# Altium PCB AMS_Master.PcbDoc
Units mm, origin at the board's own origin, x right, y up, seen from the top; angles counter-clockwise.
Board outline 71.43 x 38.75 mm, 4 copper layers (Top Layer, GND, +3.3V, Bottom Layer), stack 0.603 mm thick; 94 components, 55 nets, 299 pads, 64 vias.
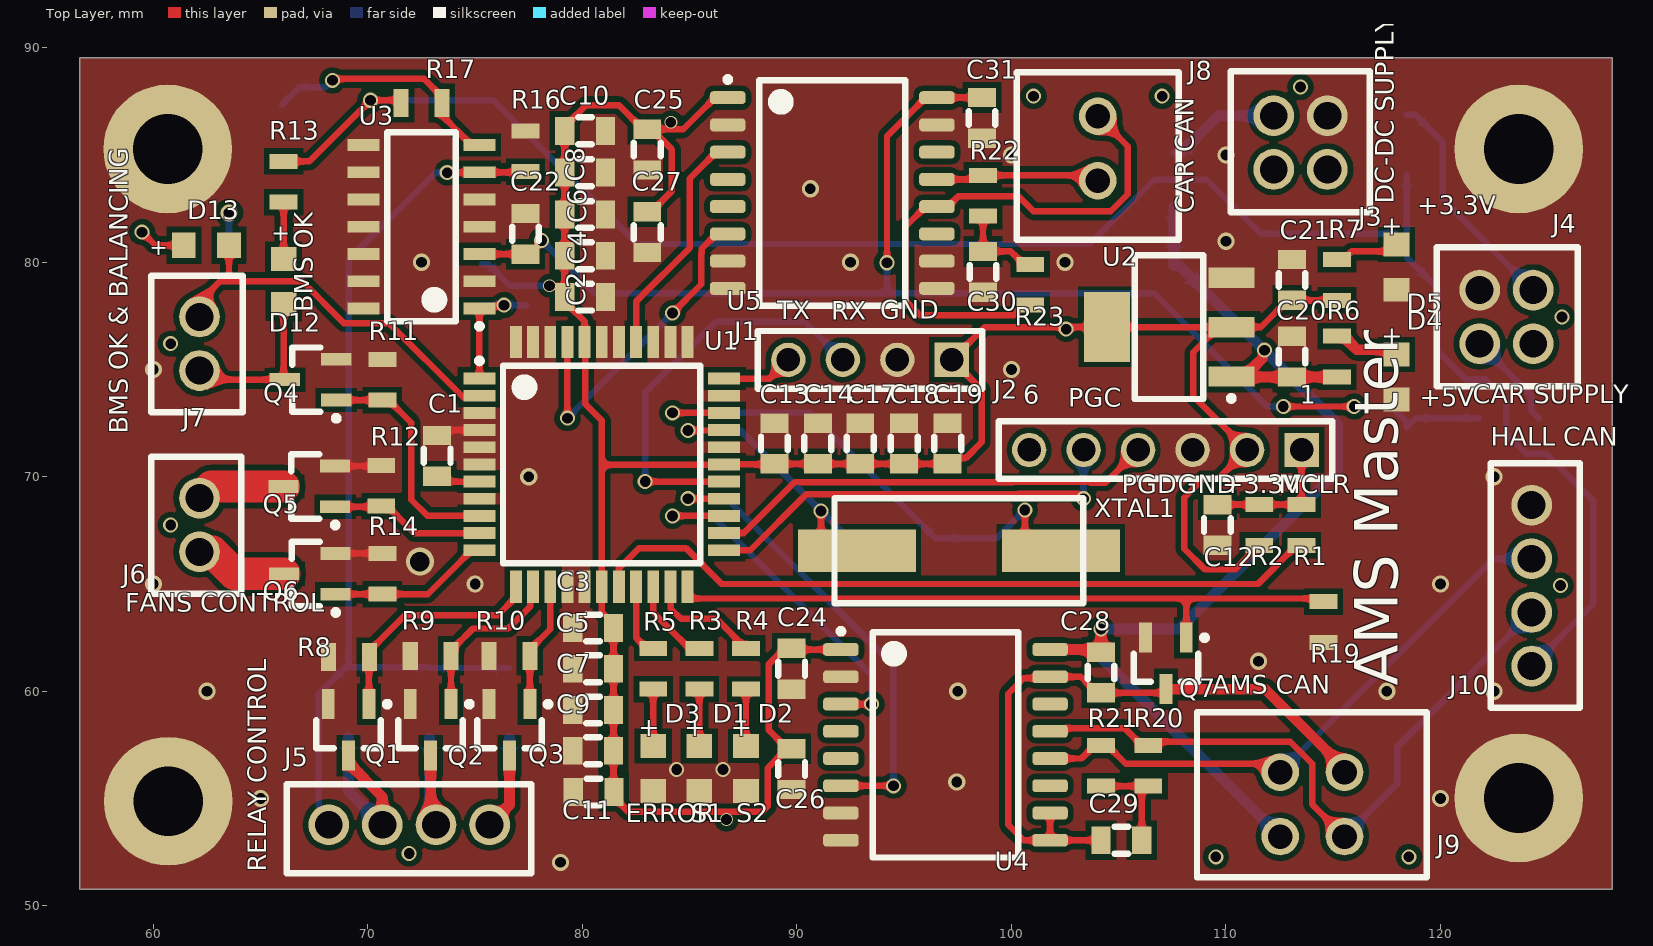
[diagram p0: Top Layer view]
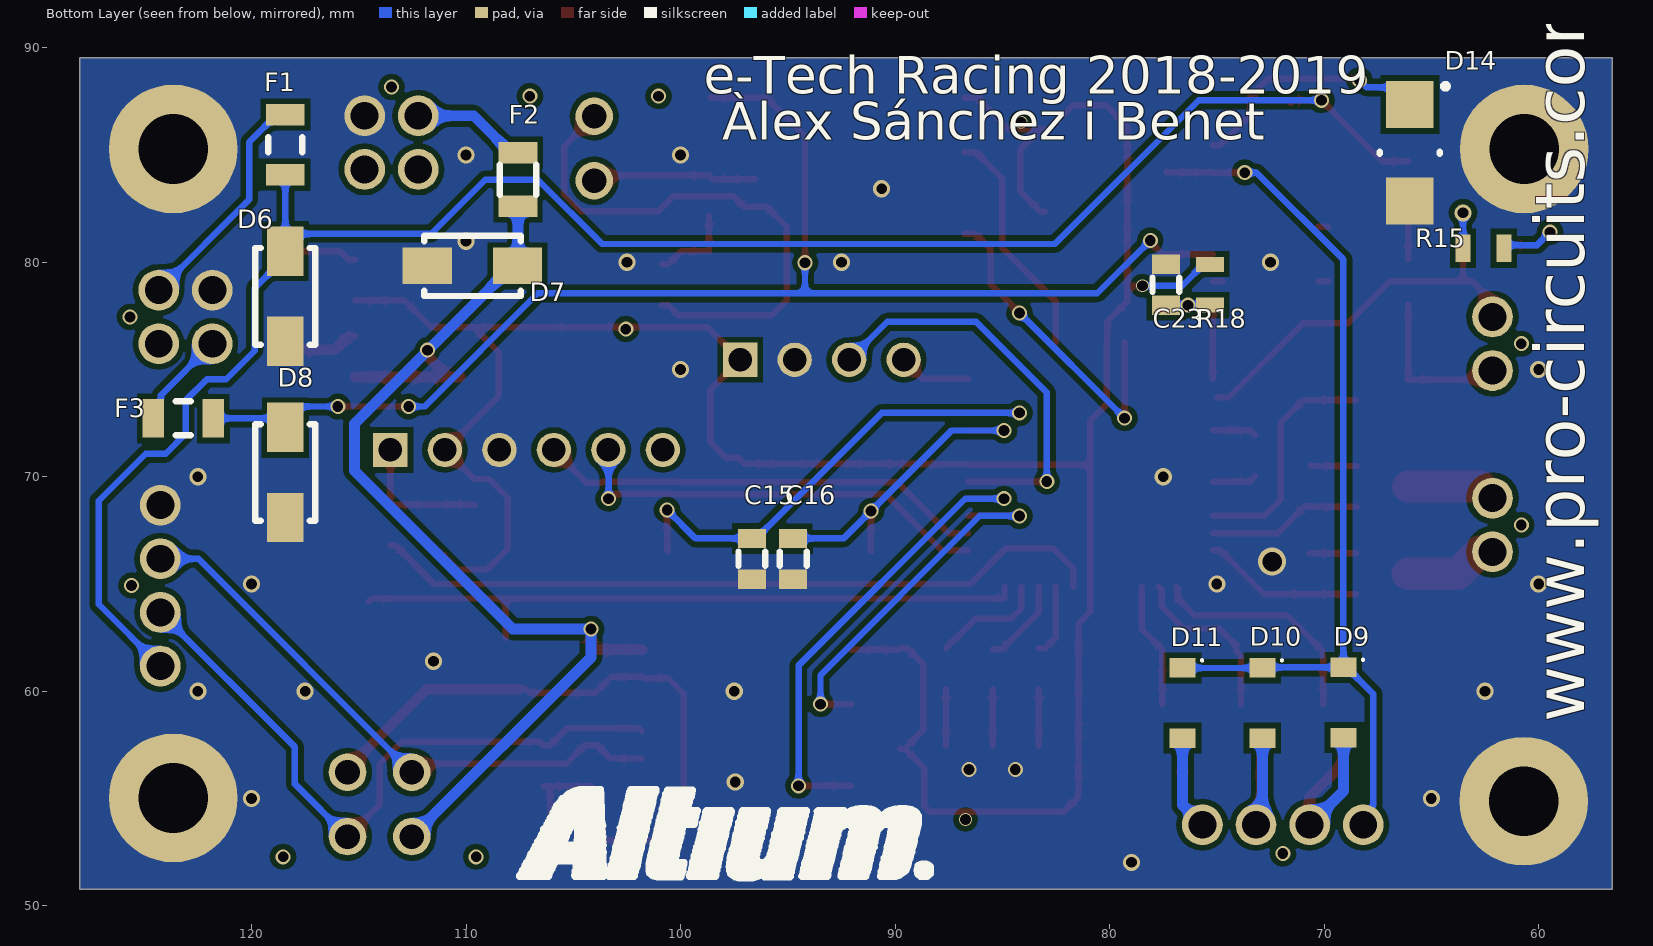
[diagram p1: Bottom Layer view, seen from below]
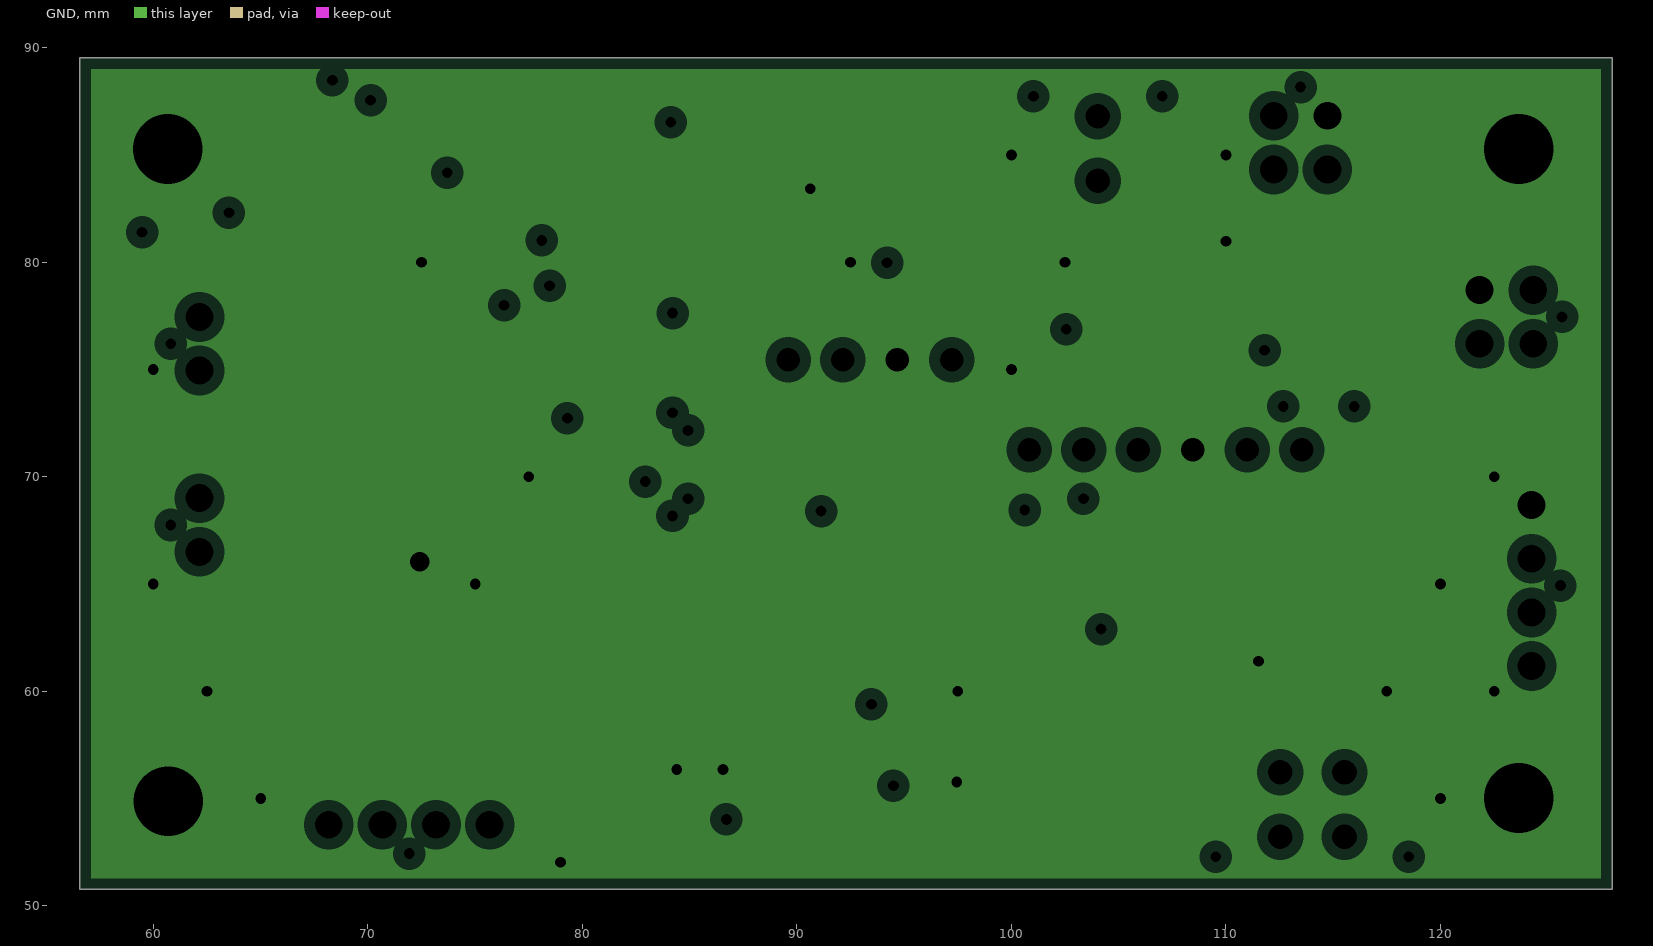
[diagram p2: GND, clearances drawn from the general rule]
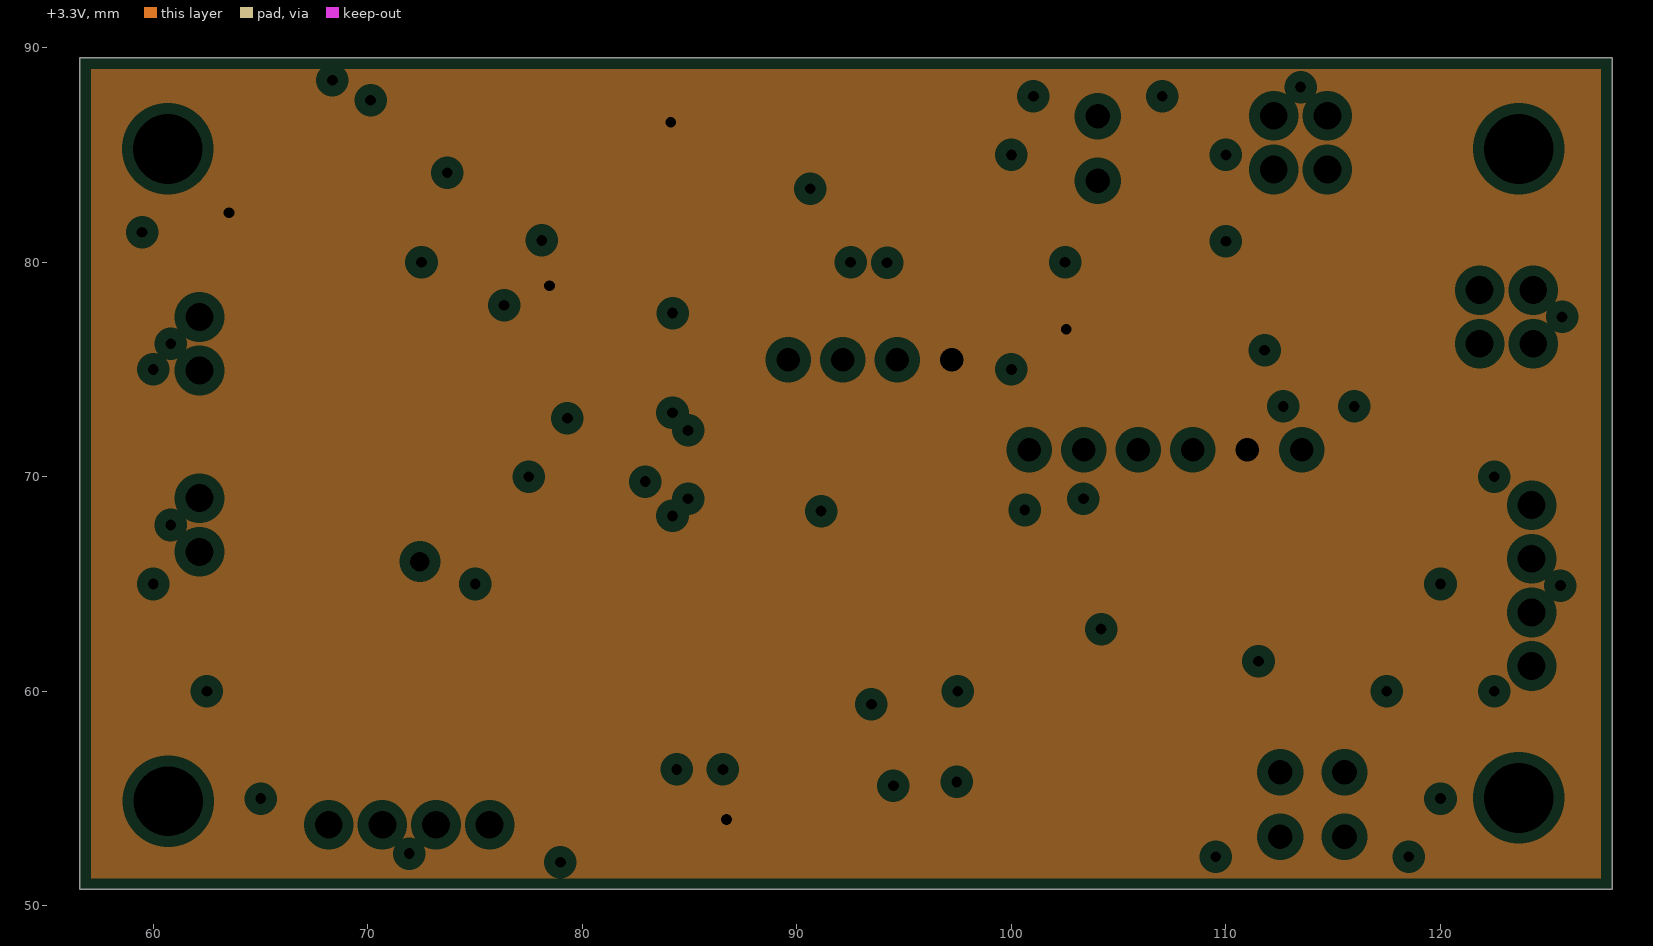
[diagram p3: +3.3V, clearances drawn from the general rule]
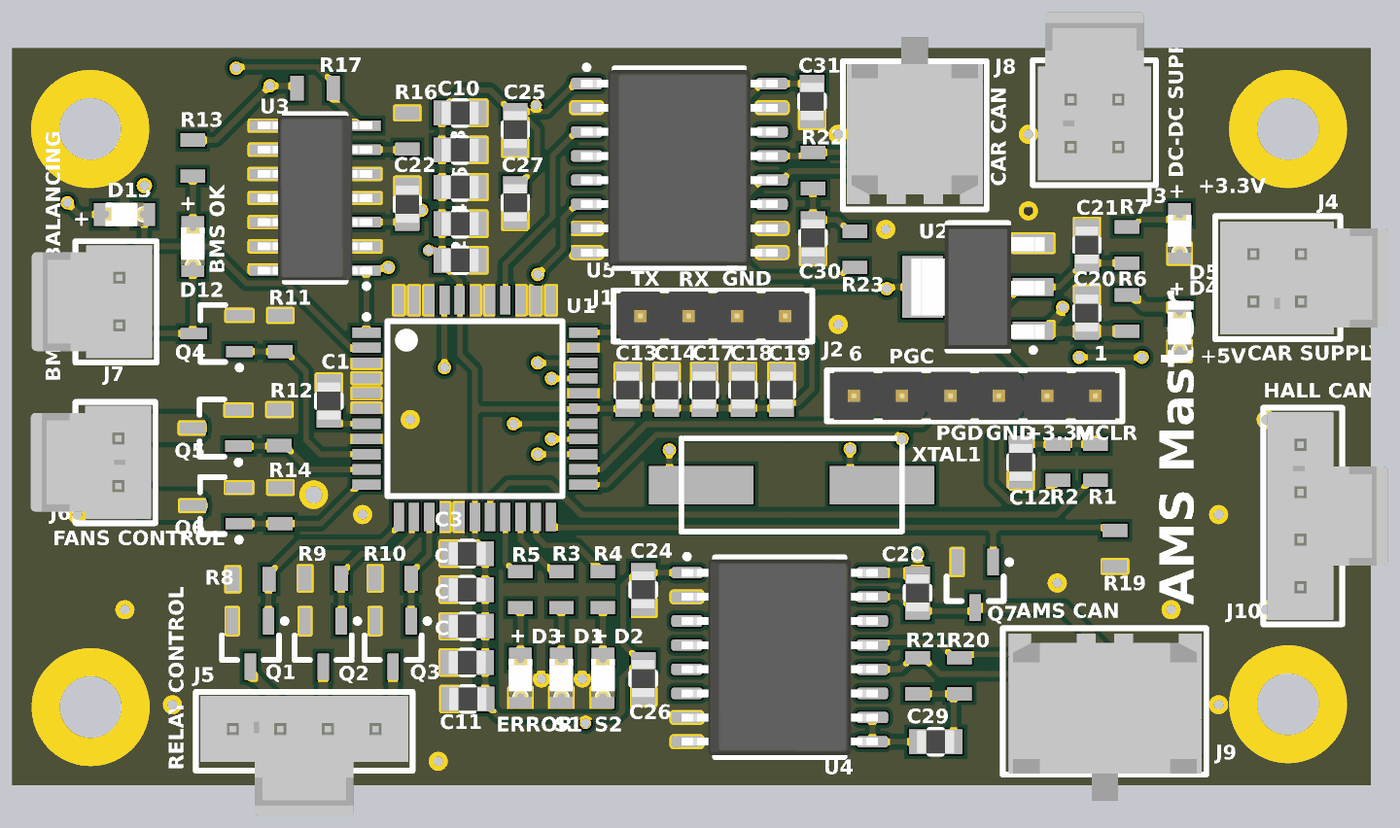
[diagram p4: 3D render of the assembled board from above, using the file's embedded part models]

## Layer stack, top to bottom
Top Solder: solder mask 0.0102, Solder Resist, Dk 3.5
Top Layer: signal copper 0.0356
Dielectric 2: prepreg 0.0711, PP-006, Dk 4.1
GND: plane copper 0.035, net GND
Dielectric 1: dielectric 0.32, FR-4, Dk 4.8
+3.3V: plane copper 0.035, net +3.3
Dielectric 3: prepreg 0.0711, PP-006, Dk 4.1
Bottom Layer: signal copper 0.0356
Bottom Solder: solder mask 0.0102, Solder Resist, Dk 3.5

## Board outline
56.575,50.775 56.575,89.525 128,89.525 128,50.775

## Design rules (kind name [scope] priority, off if disabled: settings)
Clearance [All] p1: gap=0.254 ignorepadtopadclearanceinfootprint=FALSE except(0: Arc-Hole Track-Hole SMDPad-Hole THPad-Hole Via-Hole Fill-Hole Poly-Hole Region-Hole Text-Hole; 0.2: SMDPad-SMDPad)
PlaneClearance [All] p1: clearance=0.508
PlaneConnect [All] p1: planeconnectstyle=Relief reliefexpansion=0.508 reliefentries=4 reliefconductorwidth=0.254 reliefairgap=0.254
PolygonConnect [All] p1: connectstyle=Direct reliefconductorwidth=0.254 reliefentries=4 polygonreliefangle="90 Angle" airgapwidth=0.254
RoomDefinition AMS_supply [InComponentClass('AMS_supply')] p1: confinementstyle=ConfineIn formatcopy=TRUE lockcomponents=FALSE outline 102.65,65.975 129.675,65.975 129.675,92.1 102.65,92.1
RoomDefinition AMS_MCU [InComponentClass('AMS_MCU')] p2: confinementstyle=ConfineIn formatcopy=TRUE lockcomponents=FALSE outline 72.1,54.2 115.175,54.2 115.175,96.4 72.1,96.4
RoomDefinition AMS_Control_2 [InComponentClass('AMS_Control_2')] p3: confinementstyle=ConfineIn formatcopy=TRUE lockcomponents=FALSE outline 56.325,52.1 84.05,52.1 84.05,89.475 56.325,89.475
RoomDefinition AMS_Control [InComponentClass('AMS_Control')] p4: confinementstyle=ConfineIn formatcopy=TRUE lockcomponents=FALSE outline 79.875,47.475 79.875,82.025 56.975,82.025 56.975,47.475
RoomDefinition AMS_CAN [InComponentClass('AMS_CAN')] p5: confinementstyle=ConfineIn formatcopy=TRUE lockcomponents=FALSE outline 54.023,48.175 130.45,48.175 130.45,94.95 54.023,94.95
RoutingVias [All] p1: holewidth=0.3 width=0.3 viastyle="Through Hole" minholewidth=0.3 minwidth=0.3 maxholewidth=0.7 maxwidth=0.7
SolderMaskExpansion [All] p1: expansion=0.102
Width [All] p1: maxlimit=1.5 minlimit=0.254 preferedwidth=0.254 minimp=50.000000 maximp=50.000000 favimp=50.000000
28 further rules are at their usual default settings.

## Classes and differential pairs
component class AMS_Control_2: C22 C23 D14 R16 R17 R18 U3
component class AMS_supply: C20 C21 D4 D5 D6 D7 D8 F1 F2 F3 J3 J4 R6 R7 U2
component class AMS_MCU: C1 C2 C3 C4 C5 C6 C7 C8 C9 C10 C11 C12 C13 C14 C15 C16 C17 C18 C19 D1 D2 D3 J1 J2 R1 R2 R3 R4 R5 U1 XTAL1
component class AMS_Control: D9 D10 D11 D12 D13 J5 J6 J7 Q1 Q2 Q3 Q4 Q5 Q6 R8 R9 R10 R11 R12 R13 R14 R15
component class AMS_CAN: C24 C25 C26 C27 C28 C29 C30 C31 J8 J9 J10 Q7 R19 R20 R21 R22 R23 U4 U5

## Components (designator, comment, footprint, x,y, rotation, side; value= is the part's Value field where it differs from the comment)
C1 "10uF" "0805_2x1.25x1.25mm_Reflow Soldering" 73.225,70.975 r90 top
C2 "1uF" "0805_2x1.25x1.25mm_Reflow Soldering" 80.125,78.375 r0 top
C3 "1uF" "0805_2x1.25x1.25mm_Reflow Soldering" 80.5,62.95 r180 top
C4 "100nF" "0805_2x1.25x0.8mm_Reflow Soldering" 80.125,80.3 r0 top
C5 "100nF" "0805_2x1.25x0.8mm_Reflow Soldering" 80.5,61.05 r180 top
C6 "10nF" "0805_2x1.25x0.8mm_Reflow Soldering" 80.125,82.225 r0 top
C7 "10nF" "0805_2x1.25x0.8mm_Reflow Soldering" 80.5,59.125 r180 top
C8 "1nF" "0805_2x1.25x0.8mm_Reflow Soldering" 80.125,84.175 r0 top
C9 "1nF" "0805_2x1.25x0.8mm_Reflow Soldering" 80.5,57.225 r180 top
C10 "100pF" "0805_2x1.25x0.6mm_Reflow Soldering" 80.125,86.125 r0 top
C11 "100pF" "0805_2x1.25x0.6mm_Reflow Soldering" 80.525,55.3 r180 top
C12 "10nF" "0805_2x1.25x0.8mm_Reflow Soldering" 109.6,67.75 r90 top
C13 "100pF" "0805_2x1.25x0.6mm_Reflow Soldering" 88.95,71.55 r90 top
C14 "1nF" "0805_2x1.25x0.8mm_Reflow Soldering" 90.975,71.55 r90 top
C15 "15pF" "0805_2x1.25x0.6mm_Reflow Soldering" 96.675,66.175 r270 bottom
C16 "15pF" "0805_2x1.25x0.6mm_Reflow Soldering" 94.75,66.175 r270 bottom
C17 "10nF" "0805_2x1.25x0.8mm_Reflow Soldering" 92.95,71.55 r90 top
C18 "100nF" "0805_2x1.25x0.8mm_Reflow Soldering" 95,71.55 r90 top
C19 "1uF" "0805_2x1.25x1.25mm_Reflow Soldering" 97.025,71.55 r90 top
C20 "100nF" "0805_2x1.25x0.8mm_Reflow Soldering" 113.075,75.6 r270 top
C21 "10nF" "0805_2x1.25x0.8mm_Reflow Soldering" 113.075,79.175 r270 top
C22 "100nF" "0805_2x1.25x0.8mm_Reflow Soldering" 77.35,81.325 r270 top
C23 "15pF" "0805_2x1.25x0.6mm_Reflow Soldering" 77.375,78.95 r270 bottom
C24 "10uF" "0805_2x1.25x1.25mm_Reflow Soldering" 89.75,61.05 r90 top
C25 "10uF" "0805_2x1.25x1.25mm_Reflow Soldering" 83.025,85.25 r90 top
C26 "100nF" "0805_2x1.25x0.8mm_Reflow Soldering" 89.75,56.375 r90 top
C27 "100nF" "0805_2x1.25x0.8mm_Reflow Soldering" 83.025,81.4 r90 top
C28 "100nF" "0805_2x1.25x0.8mm_Reflow Soldering" 104.175,60.875 r90 top
C29 "10nF" "0805_2x1.25x0.8mm_Reflow Soldering" 105.125,53.055 r0 top
C30 "10nF" "0805_2x1.25x0.8mm_Reflow Soldering" 98.675,79.551 r90 top
C31 "100nF" "0805_2x1.25x0.8mm_Reflow Soldering" 98.625,86.725 r90 top
D1 "Blue" WL-SMCW_0805 85.45,56.4 r90 top
D2 "Blue" WL-SMCW_0805 87.625,56.4 r90 top
D3 "Red" WL-SMCW_0805 83.3,56.4 r90 top
D4 "Green" WL-SMCW_0805 117.95,74.65 r90 top
D5 "Bright Green" WL-SMCW_0805 117.95,79.775 r90 top
D6 "12V" WE-TVSP_DO-214AC_Bidirectional 118.425,78.413 r90 bottom
D7 "5V" WE-TVSP_DO-214AC_Bidirectional 109.7,79.825 r180 bottom
D8 "5V" WE-TVSP_DO-214AC_Bidirectional 118.425,70.2 r90 bottom
D9 "MBR0540T1G" MBR0540T1G 69.1,59.475 r270 bottom
D10 "MBR0540T1G" MBR0540T1G 72.875,59.45 r270 bottom
D11 "MBR0540T1G" MBR0540T1G 76.6,59.45 r270 bottom
D12 "Blue" WL-SMCW_0805 66.075,79.1 r90 top
D13 "Blue" WL-SMCW_0805 62.475,80.789 r180 top
D14 "6.2V" BZG05C-M-Series 66,85.1 r270 bottom
F1 "30V, 0.125A" 1206L012 118.425,85.475 r90 bottom
F2 "63 V, 1A" "437 Series" 107.575,83.85 r90 bottom
F3 "30V, 0.125A" 1206L012 123.175,72.725 r0 bottom
J1 "61300411121" 61300411121 93.41,75.45 r180 top
J2 "61300611121" 61300611121 107.175,71.25 r180 top
J3 "105310-2104" 105310-2104 113.475,86.825 r0 top
J4 "105310-1104" 105310-1104 124.325,77.45 r270 top
J5 "105309-1104" 105309-1104 71.925,53.775 r180 top
J6 "105309-1102" 105309-1102 62.15,67.75 r90 top
J7 "105309-2102" 105309-2102 62.15,76.2 r90 top
J8 "43045-0212" 43045-0212 104.025,85.3 r270 top
J9 "43045-0427" 43045-0427 114.025,53.225 r180 top
J10 "105309-2104" 105309-2104 124.25,64.925 r270 top
Q1 "CPH3455" CPH3455 69.1,58.2 r270 top
Q2 "CPH3455" CPH3455 72.925,58.2 r270 top
Q3 "CPH3455" CPH3455 76.6,58.2 r270 top
Q4 "CPH3455" CPH3455 67.325,74.525 r180 top
Q5 "CPH3455" CPH3455 67.275,69.55 r180 top
Q6 "CPH3455" CPH3455 67.3,65.475 r180 top
Q7 "CPH3455" CPH3455 107.2,61.3 r270 top
R1 "100Ω" CR0805 113.525,67.75 r90 top
R2 "10kΩ" CR0805 111.55,67.75 r270 top
R3 "470Ω" CR0805 85.45,61.05 r90 top
R4 "470Ω" CR0805 87.625,61.05 r90 top
R5 "470Ω" CR0805 83.3,61.05 r90 top
R6 "470Ω" CR0805 115.175,75.6 r270 top
R7 "470Ω" CR0805 115.175,79.175 r270 top
R8 "10kΩ" CR0805 69.125,61.6 r0 top
R9 "10kΩ" CR0805 72.925,61.65 r0 top
R10 "10kΩ" CR0805 76.6,61.65 r0 top
R11 "10kΩ" CR0805 70.675,74.525 r270 top
R12 "10kΩ" CR0805 70.625,69.575 r270 top
R13 "10kΩ" CR0805 66.075,83.75 r90 top
R14 "10kΩ" CR0805 70.675,65.475 r270 top
R15 "470Ω" CR0805 62.575,80.65 r0 bottom
R16 "10kΩ" CR0805 77.35,85.175 r270 top
R17 "10kΩ" CR0805 72.5,87.425 r180 top
R18 "10kΩ" CR0805 75.325,78.95 r90 bottom
R19 "10kΩ" CR0805 114.55,63.225 r90 top
R20 "60.4Ω" CR0805 106.375,56.525 r90 top
R21 "60.4Ω" CR0805 104.175,56.525 r90 top
R22 "60.4Ω" CR0805 98.675,83.1 r90 top
R23 "60.4Ω" CR0805 100.875,78.95 r270 top
U1 "dsPIC33EP256GM604" dsPIC33EP256GM604 80.9,70.575 r0 top
U2 "1.5 - 13.8 Vin, 3.3 Vout" LM1117IMP3.3 107.35,76.975 r180 top
U3 "LM339D" LM339D 72.5,81.65 r180 top
U4 "ISO1050DW" ISO1050DW 96.925,57.5 r0 top
U5 "ISO1050DW" ISO1050DW 91.65,83.225 r0 top
XTAL1 "20MHz" 830028710 97.55,66.55 r0 top

## Footprints (in the part's own frame and the unit in brackets; to place one, negate y for a bottom-side part, rotate by r counter-clockwise, add the part's x,y. Pads: shape width x height; smd on the part's side, far side on the other; paste and mask are expansions set on the pad)
"437 Series" [mm] "Littlefuse, 437A Series"
  rect 1x1.8 smd: 1(-1.25,0) 2(1.25,0)
  silkscreen extent -0.7,-0.85 0.7,0.85, body extent -1.6,-0.71 1.6,0.71, height 1
"0805_2x1.25x0.6mm_Reflow Soldering" [mm] "Ceramic Capacitors, 0805, body 2x1.25mm"
  rect 0.9x1.3 smd: 1(-0.95,0) 2(0.95,0)
  silkscreen extent -0.32,-0.62 0.32,0.63, body extent -1,-0.62 1,0.63, height 0.63
"0805_2x1.25x0.8mm_Reflow Soldering" [mm] "Ceramic Capacitors, 0805, body 2x1.25mm"
  rect 0.9x1.3 smd: 1(-0.95,0) 2(0.95,0)
  silkscreen extent -0.32,-0.62 0.32,0.63, body extent -1,-0.62 1,0.63, height 0.83
"0805_2x1.25x1.25mm_Reflow Soldering" [mm] "Ceramic Capacitors, 0805, body 2x1.25mm"
  rect 0.9x1.3 smd: 1(-0.95,0) 2(0.95,0)
  silkscreen extent -0.32,-0.62 0.32,0.63, body extent -1,-0.62 1,0.63, height 1.28
1206L012 [mm] "Littelfuse, 1206L Series"
  rect 1x1.8 smd: 1(-1.4,0) 2(1.4,0)
  silkscreen extent -0.35,-0.8 0.35,0.8, body extent -1.7,-0.9 1.7,0.9, height 1.45
43045-0212 [mm] "Micro-Fit 3.0 Vertical Header, 3.00mm Pitch, Dual Row, 2 Circuits, Black"
  round 1.75 hole 1.15: 1(1.5,0) 2(-1.5,0)
  silkscreen extent -3.55,-3.77 4.25,3.77, body extent -4.8,-3.57 3.97,3.58, height 9.95
43045-0427 [mm] "Micro-Fit 3.0 Vertical Header, 3.00mm Pitch, Dual Row, 4 Circuits, Black"
  round 1.75 hole 1.15: 1(1.5,0) 2(-1.5,0) 3(1.5,-3) 4(-1.5,-3)
  silkscreen extent -5.33,-5.8 5.38,1.9, body extent -5.07,-5.52 5.08,3.25, height 9.95
105309-1102 [mm] "Molex, Nano-Fit, Right Angle, Single Row, 2 Circuits, Pitch 2.5 mm, Black"
  round 1.9 hole 1.3: 1(1.25,0) 2(-1.25,0)
  silkscreen extent -3.2,-1.95 3.17,2.25, body extent -2.97,-1.74 2.97,4.6, height 10.53
105309-1104 [mm] "Molex, Nano-Fit, Right Angle, Single Row, 4 Circuits, Pitch 2.5 mm, Black"
  round 1.9 hole 1.3: 1(3.75,0) 2(1.25,0) 3(-1.25,0) 4(-3.75,0)
  silkscreen extent -5.7,-1.9 5.7,2.25, body extent -5.47,-1.69 5.47,4.65, height 10.53
105309-2102 [mm] "Molex, Nano-Fit, Right Angle, Single Row, 2 Circuits, Pitch 2.5 mm, Natural"
  round 1.9 hole 1.3: 1(1.25,0) 2(-1.25,0)
  silkscreen extent -3.2,-2.02 3.17,2.25, body extent -2.97,-1.79 2.97,4.55, height 10.53
105309-2104 [mm] "Molex, Nano-Fit, Right Angle, Single Row, 4 Circuits, Pitch 2.5 mm, Natural"
  round 1.9 hole 1.3: 1(3.75,0) 2(1.25,0) 3(-1.25,0) 4(-3.75,0)
  silkscreen extent -5.7,-1.9 5.7,2.25, body extent -5.47,-1.69 5.47,4.65, height 10.53
105310-1104 [mm] "Molex, Nano-Fit, Right Angle, Dual Row, 4 Circuits, Pitch 2.5 mm, Black"
  round 1.9 hole 1.3: 1(1.25,0) 2(-1.25,0) 3(1.25,-2.5) 4(-1.25,-2.5)
  silkscreen extent -3.25,-4.5 3.22,2.07, body extent -2.97,-4.24 2.97,4.6, height 10.53
105310-2104 [mm] "Molex, Nano-Fit, Right Angle, Dual Row, 4 Circuits, Pitch 2.5 mm, Natural"
  round 1.9 hole 1.3: 1(1.25,0) 2(-1.25,0) 3(1.25,-2.5) 4(-1.25,-2.5)
  silkscreen extent -3.25,-4.5 3.22,2.07, body extent -2.97,-4.24 2.97,4.6, height 10.53
830028710 [mm]
  rect 5.5x2 smd: 1(-4.75,0) 2(4.75,0)
  silkscreen extent -5.8,-2.45 5.8,2.45, body extent -5.8,-2.45 5.8,2.45, height 4.3
61300411121 [mm] "Pin Header, pitch 2.54 mm, THT, Vertical, single row, 4p"
  rect 1.6x1.6 hole 1.1: 1(-3.81,0)
  round 1.6 hole 1.1: 2(-1.27,0) 3(1.27,0) 4(3.81,0)
  silkscreen extent -5.23,-1.35 5.23,1.35, body extent -5.08,-1.27 5.08,1.27, height 8.57
61300611121 [mm] "Pin Header, pitch 2.54 mm, THT, Vertical, single row, 6p"
  rect 1.6x1.6 hole 1.1: 1(-6.35,0)
  round 1.6 hole 1.1: 2(-3.81,0) 3(-1.27,0) 4(1.27,0) 5(3.81,0) 6(6.35,0)
  silkscreen extent -7.77,-1.35 7.77,1.35, body extent -7.62,-1.27 7.62,1.27, height 8.57
BZG05C-M-Series [mm] "Molded Diode, 2-Leads, Body 4,35x2,55mm, IPC Medium Density"
  rect 2.2x2.21 smd: 1(-2.25,0) 2(2.25,0)
  silkscreen extent -3.22,-1.4 0.05,1.78, body extent -2.25,-1.4 2.25,1.4, height 2.3
CPH3455 [mm] "SOT23, 3-Leads, Body 2,90x2,80mm, Pitch 0,95mm, IPC Medium Density"
  rect 1.4x0.6 smd: 1(-1.2,0.95) 2(-1.2,-0.95) 3(1.2,0)
  silkscreen extent -1.32,-1.5 0.85,1.93, body extent -0.85,-1.5 0.85,1.5, height 0.95
CR0805 [mm] "Chip Resistor, 2-Leads, Body 2,00x1,25mm, IPC Medium Density"
  rect 0.7x1.3 smd: 1(-0.95,0) 2(0.95,0)
  body extent -1.08,-0.7 1.07,0.7, height 0.6
dsPIC33EP256GM604 [mm] "TQFP, 44-Leads, Body 10,00x10,00mm, Pitch 0,80mm, IPC Medium Density"
  rect 1.5x0.55 smd: 1(-5.7,4) 2(-5.7,3.2) 3(-5.7,2.4) 4(-5.7,1.6) 5(-5.7,0.8) 6(-5.7,0) 7(-5.7,-0.8) 8(-5.7,-1.6) 9(-5.7,-2.4) 10(-5.7,-3.2) 11(-5.7,-4) 23(5.7,-4) 24(5.7,-3.2) 25(5.7,-2.4) 26(5.7,-1.6) 27(5.7,-0.8) 28(5.7,0) 29(5.7,0.8) 30(5.7,1.6) 31(5.7,2.4) 32(5.7,3.2) 33(5.7,4)
  rect 0.55x1.5 smd: 12(-4,-5.7) 13(-3.2,-5.7) 14(-2.4,-5.7) 15(-1.6,-5.7) 16(-0.8,-5.7) 17(0,-5.7) 18(0.8,-5.7) 19(1.6,-5.7) 20(2.4,-5.7) 21(3.2,-5.7) 22(4,-5.7) 34(4,5.7) 35(3.2,5.7) 36(2.4,5.7) 37(1.6,5.7) 38(0.8,5.7) 39(0,5.7) 40(-0.8,5.7) 41(-1.6,5.7) 42(-2.4,5.7) 43(-3.2,5.7) 44(-4,5.7)
  silkscreen extent -5.82,-4.6 4.6,4.95, body extent -5,-5 5,5, height 1.2
ISO1050DW [mm] "SOIC, 16-Leads, Body 10,30x7,50mm, Pitch 1,27mm, IPC Medium Density"
  rrect50% 1.65x0.6 smd: 1(-4.875,4.445) 2(-4.875,3.175) 3(-4.875,1.905) 4(-4.875,0.635) 5(-4.875,-0.635) 6(-4.875,-1.905) 7(-4.875,-3.175) 8(-4.875,-4.445) 9(4.875,-4.445) 10(4.875,-3.175) 11(4.875,-1.905) 12(4.875,-0.635) 13(4.875,0.635) 14(4.875,1.905) 15(4.875,3.175) 16(4.875,4.445)
  silkscreen extent -5,-5.25 3.4,5.42, body extent -5.17,-5.15 5.17,5.15, height 2.59
LM339D [mm] "SOP, 14-Leads, Body 8,65x3,90mm, Pitch 1,27mm, IPC Medium Density"
  rect 1.5x0.55 smd: 1(-2.7,3.81) 2(-2.7,2.54) 3(-2.7,1.27) 4(-2.7,0) 5(-2.7,-1.27) 6(-2.7,-2.54) 7(-2.7,-3.81) 8(2.7,-3.81) 9(2.7,-2.54) 10(2.7,-1.27) 11(2.7,0) 12(2.7,1.27) 13(2.7,2.54) 14(2.7,3.81)
  silkscreen extent -2.83,-4.4 1.6,4.76, body extent -3.01,-4.32 3.01,4.33, height 1.75
LM1117IMP3.3 [mm] "SOT223, 4-Leads, Body 6,50x7,00mm (avg), Pitch 2,30mm, IPC Medium Density"
  rect 2.15x0.95 smd: 1(-2.9,2.3) 2(-2.9,-2.3) 3(-2.9,0)
  rect 2.15x3.25 smd: 3(2.9,0)
  silkscreen extent -3.03,-3.35 1.6,3.45, body extent -3.5,-3.25 3.5,3.25, height 1.68
MBR0540T1G [mm] "SOD-123, 2-Leads, Body 1,60x3,71mm, IPC Medium Density"
  rect 0.91x1.22 smd: 1(-1.635,0) 2(1.635,0)
  silkscreen extent -2.04,0.86 -1.94,0.96, body extent -1.42,-0.9 1.42,0.9, height 1.35
WE-TVSP_DO-214AC_Bidirectional [mm] "Power TVS Diode, 2-Leads. body 4.5x2.8mm"
  rect 2.3x1.7 smd: 1(-2.1,0) 2(2.1,0)
  silkscreen extent -2.25,-1.4 2.25,1.4, body extent -2.56,-1.33 2.56,1.34, height 2.24
WL-SMCW_0805 [mm] "SMD Mono-color Chip LED, body 2.0x1.25mm"
  rect 1.1x1.2 smd: 1(-1.05,0) 2(1.05,0)
  body extent -1,-0.63 1,0.62, height 0.7

## Part data
C1 C24 C25: library part 885012107014, "WCAP-CSGP Ceramic Capacitors, 0805, X5R, 16V, 10uF", Operating Temperature="-55 °C to +125 °C", Rated Voltage="16V DC", Ceramic Type=X5R, ComponentLink1Description=Manufacturer, ComponentLink1URL=http://www.we-online.de, ComponentLink2Description=Datasheet, ComponentLink2URL=http://katalog.we-online.de/pbs/datasheet/885012107014.pdf, Part Number=885012107014, Published Date="Oct. 2017", Publisher="Wurth Elektronik", Size=0805
C2 C3 C19: library part 885012207103, "WCAP-CSGP Ceramic Capacitors, 0805, X7R, 50V, 1uF", Operating Temperature="-55 °C to +125 °C", Rated Voltage="50V DC", Ceramic Type=X7R, ComponentLink1Description=Manufacturer, ComponentLink1URL=http://www.we-online.de, ComponentLink2Description=Datasheet, ComponentLink2URL=http://katalog.we-online.de/pbs/datasheet/885012207103.pdf, Part Number=885012207103, Publisher="Wurth Elektronik", Size=0805
C4 C5 C18 C20 C22 C26 C27 C28 C31: library part 885012207098, "WCAP-CSGP Ceramic Capacitors, 0805, X7R, 50V, 100nF", Operating Temperature="-55 °C to +125 °C", Rated Voltage="50V DC", Ceramic Type=X7R, ComponentLink1Description=Manufacturer, ComponentLink1URL=http://www.we-online.de, ComponentLink2Description=Datasheet, ComponentLink2URL=http://katalog.we-online.de/pbs/datasheet/885012207098.pdf, Part Number=885012207098, Publisher="Wurth Elektronik", Size=0805
C6 C7 C12 C17 C21 C29 C30: library part 885012207092, "WCAP-CSGP Ceramic Capacitors, 0805, X7R, 50V, 10nF", Operating Temperature="-55 °C to +125 °C", Rated Voltage="50V DC", Ceramic Type=X7R, ComponentLink1Description=Manufacturer, ComponentLink1URL=http://www.we-online.de, ComponentLink2Description=Datasheet, ComponentLink2URL=http://katalog.we-online.de/pbs/datasheet/885012207092.pdf, Part Number=885012207092, Publisher="Wurth Elektronik", Size=0805
C8 C9 C14: library part 885012007063, "WCAP-CSGP Ceramic Capacitors, 0805, NP0, 50V, 1nF", Operating Temperature="-55 °C to +125 °C", Rated Voltage="50V DC", Ceramic Type=NP0, ComponentLink1Description=Manufacturer, ComponentLink1URL=http://www.we-online.de, ComponentLink2Description=Datasheet, ComponentLink2URL=http://katalog.we-online.de/pbs/datasheet/885012007063.pdf, Part Number=885012007063, Published Date="Oct. 2017", Publisher="Wurth Elektronik", Size=0805
C10 C11 C13: library part 885012007057, "WCAP-CSGP Ceramic Capacitors, 0805, NP0, 50V, 100pF", Operating Temperature="-55 °C to +125 °C", Rated Voltage="50V DC", Ceramic Type=NP0, ComponentLink1Description=Manufacturer, ComponentLink1URL=http://www.we-online.de, ComponentLink2Description=Datasheet, ComponentLink2URL=http://katalog.we-online.de/pbs/datasheet/885012007057.pdf, Part Number=885012007057, Published Date="Oct. 2017", Publisher="Wurth Elektronik", Size=0805
C15 C16 C23: library part 885012007052, "WCAP-CSGP Ceramic Capacitors, 0805, NP0, 50V, 15pF", Operating Temperature="-55 °C to +125 °C", Rated Voltage="50V DC", Ceramic Type=NP0, ComponentLink1Description=Manufacturer, ComponentLink1URL=http://www.we-online.de, ComponentLink2Description=Datasheet, ComponentLink2URL=http://katalog.we-online.de/pbs/datasheet/885012007052.pdf, Part Number=885012007052, Published Date="Oct. 2017", Publisher="Wurth Elektronik", Size=0805
D1 D2 D12 D13: library part 150080BS75000, "SMT Mono-color Chip LED Waterclear WL-SMCW, size 0805, Blue, 3.2 V, 140 deg, 145 mcd", Forward Voltage="3.2 V", Operating Temperature="-40 to 85 degC", Chip Technology=InGaN, ComponentLink1Description=Manufacturer, ComponentLink1URL=http://www.we-online.de, ComponentLink2Description=Datasheet, ComponentLink2URL=https://katalog.we-online.de/led/datasheet/150080BS75000.pdf, Dominant Wavelength="470 nm", Emitting Color=Blue, Luminous Intensity="145 mcd", Mounting Technology=SMT, Packaging="Tape and Reel", Part Number=150080BS75000, Peak Wavelength="465 nm", Published Date="November 2018", Publisher="Wurth Elektronik", Size=0805, Viewing Angle="140 deg"
D3: library part 150080RS75000, "SMT Mono-color Chip LED Waterclear WL-SMCW, size 0805, Red, 2 V, 140 deg, 150 mcd", Forward Voltage="2 V", Operating Temperature="-40 to 85 degC", Chip Technology=AlInGaP, ComponentLink1Description=Manufacturer, ComponentLink1URL=http://www.we-online.de, ComponentLink2Description=Datasheet, ComponentLink2URL=https://katalog.we-online.de/led/datasheet/150080RS75000.pdf, Dominant Wavelength="625 nm", Emitting Color=Red, Luminous Intensity="150 mcd", Mounting Technology=SMT, Packaging="Tape and Reel", Part Number=150080RS75000, Peak Wavelength="630 nm", Published Date="November 2018", Publisher="Wurth Elektronik", Size=0805, Viewing Angle="140 deg"
D4: library part 150080GS75000, "SMT Mono-color Chip LED Waterclear WL-SMCW, size 0805, Green, 3.2 V, 140 deg, 450 mcd", Forward Voltage="3.2 V", Operating Temperature="-40 to 85 degC", Chip Technology=InGaN, ComponentLink1Description=Manufacturer, ComponentLink1URL=http://www.we-online.de, ComponentLink2Description=Datasheet, ComponentLink2URL=https://katalog.we-online.de/led/datasheet/150080GS75000.pdf, Dominant Wavelength="525 nm", Emitting Color=Green, Luminous Intensity="450 mcd", Mounting Technology=SMT, Packaging="Tape and Reel", Part Number=150080GS75000, Peak Wavelength="515 nm", Published Date="November 2018", Publisher="Wurth Elektronik", Size=0805, Viewing Angle="140 deg"
D5: library part 150080VS75000, "SMT Mono-color Chip LED Waterclear WL-SMCW, size 0805, Bright Green, 2 V, 140 deg, 40 mcd", Forward Voltage="2 V", Operating Temperature="-40 to 85 degC", Chip Technology=AlInGaP, ComponentLink1Description=Manufacturer, ComponentLink1URL=http://www.we-online.de, ComponentLink2Description=Datasheet, ComponentLink2URL=https://katalog.we-online.de/led/datasheet/150080VS75000.pdf, Dominant Wavelength="570 nm", Emitting Color="Bright Green", Luminous Intensity="40 mcd", Mounting Technology=SMT, Packaging="Tape and Reel", Part Number=150080VS75000, Peak Wavelength="572 nm", Published Date="November 2018", Publisher="Wurth Elektronik", Size=0805, Viewing Angle="140 deg"
D6: library part 824501121, "WE-TVSP Power TVS Diode, size DO-214AC, Bidirectional, 400 W, 12 VDC", Operating Temperature="-65 to 150 degC", Peak Pulse Current="20.1 A", Power Dissipation="400 W", Reverse Breakdown Voltage="14 V", Reverse Stand-Off Voltage="12 V", Surge Clamping Voltage="19.9 V", ComponentLink1Description=Manufacturer, ComponentLink1URL=http://www.we-online.de, ComponentLink2Description=Datasheet, ComponentLink2URL=https://katalog.we-online.de/pbs/datasheet/824501121.pdf, Mounting Technology=SMT, Packaging="Tape and Reel", Part Number=824501121, Polarity=Bidirectional, Publisher="Wurth Elektronik", Size=DO-214AC
D7 D8: library part 824501500, "WE-TVSP Power TVS Diode, size DO-214AC, Bidirectional, 400 W, 5 VDC", Manufacturer="Wurth Elektronik", Operating Temperature="-65ºC to 150 ºC", Peak Pulse Current="43.5 A", Power Dissipation="400 W", Reverse Breakdown Voltage="6.7 V", Reverse Stand-Off Voltage="5 V", Surge Clamping Voltage="9.2 V", ComponentLink1Description=Manufacturer, ComponentLink1URL=http://www.we-online.de, ComponentLink2Description=Datasheet, ComponentLink2URL=https://katalog.we-online.de/pbs/datasheet/824501500.pdf, Mounting Technology=SMT, Packaging="Tape and Reel", Part Number=824501500, Polarity=Bidirectional, Size=DO-214AC
D9 D10 D11: "Surface Mount Schottky Power Rectifier", Manufacturer="On Semiconductor", ComponentLink1Description=Datasheet, ComponentLink1URL=https://www.onsemi.com/pub/Collateral/MBR0540T1-D.PDF
D14: library part BZG05C6V2-E3-TR, "Zener Diode", Manufacturer=Vishay, ComponentLink1Description=Datasheet, ComponentLink1URL=http://www.vishay.com/docs/86135/bzg05c-m-series.pdf
F1 F3: library part 1206L012, "1206L Series", Manufacturer=Littlefuse, ComponentLink1Description=Datasheet, ComponentLink1URL=https://www.littelfuse.com/~/media/electronics/datasheets/resettable_ptcs/littelfuse_ptc_1206l_datasheet.pdf.pdf
F2: library part 0437001A, "437A Series Fuse", Manufacturer=Littlefuse, ComponentLink1Description=Datasheet, ComponentLink1URL=https://www.littelfuse.com/~/media/electronics/datasheets/fuses/littelfuse_fuse_437a_datasheet.pdf.pdf
J1: "THT Vertical Pin Header WR-PHD, Pitch 2.54 mm, Single Row, 4 pins", Contact Resistance="20 mOhm", Operating Temperature="-40 to 105 degC", Rated Current="3 A", Withstanding Voltage="500 VAC", Working Voltage="250 VAC", ComponentLink1Description=Manufacturer, ComponentLink1URL=http://www.we-online.de, ComponentLink2Description=Datasheet, ComponentLink2URL=https://katalog.we-online.de/em/datasheet/6130xx11121.pdf, Gender=Male, Mounting Technology=THT, Orientation=Vertical, Packaging=Bag, Part Number=61300411121, Pin Number=4, Pitch="2.54 mm", Published Date="August 2018", Publisher="Wurth Elektronik", Row Number=Single
J2: "THT Vertical Pin Header WR-PHD, Pitch 2.54 mm, Single Row, 6 pins", Contact Resistance="20 mOhm", Operating Temperature="-40 to 105 degC", Rated Current="3 A", Withstanding Voltage="500 VAC", Working Voltage="250 VAC", ComponentLink1Description=Manufacturer, ComponentLink1URL=http://www.we-online.de, ComponentLink2Description=Datasheet, ComponentLink2URL=https://katalog.we-online.de/em/datasheet/6130xx11121.pdf, Gender=Male, Mounting Technology=THT, Orientation=Vertical, Packaging=Bag, Part Number=61300611121, Pin Number=6, Pitch="2.54 mm", Published Date="August 2018", Publisher="Wurth Elektronik", Row Number=Single
J3: "Nano-Fit Vertical Header, Through Hole, 2.50mm Pitch, Dual Row, 4 Circuits, Natural", Manufacturer=Molex, Operating Temperature="-40° to +105°C", Rated Current=6.5A, Rated Voltage="250V DC", ComponentLink1Description=Datasheet, ComponentLink1URL=https://www.molex.com/webdocs/datasheets/pdf/en-us/1053102104_PCB_HEADERS.pdf
J4: "Nano-Fit Vertical Header, Through Hole, 2.50mm Pitch, Dual Row, 4 Circuits, Black", Manufacturer=Molex, Operating Temperature="-40° to +105°C", Rated Current=6.5A, Rated Voltage="250V DC", ComponentLink2Description=Datasheet, ComponentLink2URL=https://www.molex.com/webdocs/datasheets/pdf/en-us/1053101104_PCB_HEADERS.pdf
J5: "Nano-Fit Vertical Header, Through Hole, 2.50mm Pitch, Single Row, 4 Circuits, Black", Manufacturer=Molex, Operating Temperature="-40° to +105°C", Rated Current=6.5A, Rated Voltage="250V DC", ComponentLink1Description=Datasheet, ComponentLink1URL=https://www.molex.com/webdocs/datasheets/pdf/en-us/1053091104_PCB_HEADERS.pdf
J6: "Nano-Fit Vertical Header, Through Hole, 2.50mm Pitch, Single Row, 2 Circuits, Black", Manufacturer=Molex, Operating Temperature="-40° to +105°C", Rated Current=6.5A, Rated Voltage="250V DC", ComponentLink1Description=Datahsheet, ComponentLink1URL=https://www.molex.com/webdocs/datasheets/pdf/en-us/1053091103_PCB_HEADERS.pdf
J7: "Nano-Fit Vertical Header, Through Hole, 2.50mm Pitch, Single Row, 2 Circuits, Natural", Manufacturer=Molex, Operating Temperature="-40° to +105°C", Rated Current=6.5A, Rated Voltage="250V DC", ComponentLink1Description=Datasheet, ComponentLink1URL=https://www.molex.com/webdocs/datasheets/pdf/en-us/1053092102_PCB_HEADERS.pdf
J8: "Micro-Fit 3.0 Vertical Header, 3.00mm Pitch, Dual Row, 2 Circuits, Black", Manufacturer=Molex, Operating Temperature="-40° to +105°C", Rated Current=8.5A, Rated Voltage="600V DC", Circuits=2, ComponentLink1Description=Datasheet, ComponentLink1URL=https://www.molex.com/webdocs/datasheets/pdf/en-us/0430450212_PCB_HEADERS.pdf, Number of Row=1
J9: "Micro-Fit 3.0 Vertical Header, 3.00mm Pitch, Dual Row, 4 Circuits, Black", Manufacturer=Molex, Operating Temperature="-40° to +105°C", Rated Current=8.5A, Rated Voltage="600V DC", Circuits=4, ComponentLink1Description=Datasheet, ComponentLink1URL=https://www.molex.com/webdocs/datasheets/pdf/en-us/0430450427_PCB_HEADERS.pdf, Number of Rows=2
J10: "Nano-Fit Vertical Header, Through Hole, 2.50mm Pitch, Single Row, 4 Circuits, Natural", Manufacturer=Molex, Operating Temperature="-40° to +105°C", Rated Current=6.5A, Rated Voltage="250V DC", ComponentLink1Description=Datasheet, ComponentLink1URL=https://www.molex.com/pdm_docs/sd/1053092104_sd.pdf
Q1 Q2 Q3 Q4 Q5 Q6 Q7: "Power MOSFET 35V, 104m?, 3A, Single N-Channel", Manufacturer="ON Semiconductors", ComponentLink1Description=Datasheet, ComponentLink1URL=https://www.onsemi.com/pub/Collateral/CPH3455-D.PDF
R1: library part CR0805-FX-1000ELF, "Chip Resistor 0805", Manufacturer=Bourns, ComponentLink1Description=Datasheet, ComponentLink1URL=https://www.bourns.com/docs/product-datasheets/chpreztr.pdf?sfvrsn=566c91f1_11
R2 R8 R9 R10 R11 R12 R13 R14 R16 R17 R18 R19: library part CR0805-JW-103ELF, "Chip Resistor 0805", Manufacturer=Bourns, ComponentLink1Description=Datasheet, ComponentLink1URL=https://www.bourns.com/docs/product-datasheets/chpreztr.pdf?sfvrsn=566c91f1_11
R3 R4 R5 R6 R7 R15: library part CR0805-FX-4700GLF, "Chip Resistor 0805", Manufacturer=Bourns, ComponentLink1Description=Datasheet, ComponentLink1URL=https://www.bourns.com/docs/product-datasheets/chpreztr.pdf?sfvrsn=566c91f1_11
R20 R21 R22 R23: library part ERA6AEB60R4V, "Chip Resistor 0805", Manufacturer=Panasonic, ComponentLink1Description=Datasheet, ComponentLink1URL=https://www.bourns.com/docs/product-datasheets/chpreztr.pdf?sfvrsn=566c91f1_11
U1: "16-Bit Digital Signal Controller with High-Speed PWM, Op Amps and Advanced Analog Features", Manufacturer=Microchip, ComponentLink1Description=Datasheet, ComponentLink1URL=http://ww1.microchip.com/downloads/en/DeviceDoc/70000689d.pdf, Pins=44
U2: library part LM1117IMP-3.3/NOPB, "800-mA Low-Dropout Linear Regulator", Input Voltage="1.5-13.8 V", Manufacturer="Texas Instruments", Output Current="800 mA", Output Voltage="3.3 V", ComponentLink1Description=Datasheet, ComponentLink1URL=http://www.ti.com/lit/ds/symlink/lm1117.pdf, Reference=LM1117-3.3
U3: "Quad Differential / Comparators", Manufacturer="Texas Instrument", ComponentLink1Description=Datasheet, ComponentLink1URL=http://www.ti.com/lit/ds/symlink/lm339.pdf, Pins=14
U4 U5: "Galvanically isolated CAN / transceiver", Manufacturer="Texas Instruments", ComponentLink1Description=Datasheet, ComponentLink1URL=http://www.ti.com/lit/ds/symlink/iso1050.pdf, Pins=16
XTAL1: library part 830028710, "Industry standard SMD crystal WE-XTAL Quartz Crystal", Manufacturer="Wurth Elektronik", ComponentLink1Description=Datasheet, ComponentLink1URL=https://katalog.we-online.com/pbs/datasheet/830028710.pdf, Frequency=20MHz, Model=HC49/4HSMX, Mounting Technology=SMT

## Free pads (board coordinates)
  round 6 hole 3.25: ""(60.675,85.28) ""(60.7,54.875) ""(123.65,55.025) ""(123.65,85.28)

## Via types
v1: diameter 0.7, hole 0.5, Top Layer to Bottom Layer, 36 vias
v2: diameter 0.8, hole 0.5, Top Layer to Bottom Layer, 24 vias
v3: diameter 0.6, hole 0.5, Top Layer to Bottom Layer, 3 vias
v4: diameter 1.3, hole 0.9, Top Layer to Bottom Layer, 1 vias

## Nets (pads, with @x,y where several pads share a name; then routed paths per layer and width w, separated by ;. In a path a pad name is that pad's centre, name@x,y a point inside that pad or via, vN(x,y) a via of type N, cw(c..) or ccw(c..) an arc to the next point about the centre after c; other vN are vias at no path point)
+3.3: C2.1 C3.1 C4.1 C5.1 C6.1 C7.1 C8.1 C9.1 C10.1 C11.1 C13.1 C14.1 C17.1 C18.1 C19.1 C21.2 C24.2 C25.2 C26.2 C27.2 J1.1 J2.2 R2.2 R7.2 R15.2 R18.2 U1.17 U1.28 U1.40 U2.3 U4.1 U5.1 | length 131.2
  Top Layer w0.3: v3(78.471,78.903) 78.476,78.898 78.852,78.898 C2.1@79.175,78.575 ; C27.2 83.205,82.35 84.175,83.32 84.175,85.25 C25.2@83.225,86.2 ; 84.124,86.2 84.7,86.2 86.17,87.67 U5.1 ; v3(84.124,86.525) 84.1,86.501 84.1,86.2 C25.2@83.225,86.2 ; v3(86.716,54.025) 86.716,54.366 86.725,54.375 ; C26.2 C26.2@89.55,57.325 ; U4.1 89.805,61.945 C24.2 89.425,62 88.696,61.271 88.696,58.179 C26.2@89.55,57.325 ; R2.2 110.425,65.675 109.025,65.675 108.05,66.65 108.05,69.025 108.921,69.896 109.631,69.896 J2.2 108.635,73.6 108.624,73.6 108.475,73.749 108.475,75.8 U2.3@109.65,76.975 ; R7.2 C21.2 112.875,78.225 111.625,76.975 110.25,76.975 U2.3@109.65,76.975 ; C2.1@79.175,78.575 C2.1 79.175,78.175 80.1,77.25 U1.40 80.125,76.25 80.125,73.4 80.9,72.625 80.9,70.55 ; C2.1@79.175,78.575 C4.1 C6.1 C8.1 C10.1 79.175,86.325 80.175,87.325 81.7,87.325 82.825,86.2 C25.2 C25.2@83.225,86.2 ; 80.9,70.55 U1.17 80.9,63.7 81.45,63.15 C3.1 C5.1 C7.1 C9.1 81.45,55.325 C11.1 81.475,55.05 82.15,54.375 86.725,54.375 ; 80.9,70.55 86.575,70.55 U1.28 88.925,70.575 C13.1 C14.1 C17.1 C18.1 C19.1 97.303,70.878 97.878,70.878 98.625,71.625 98.625,74.045 J1.1 98.745,76.975 104.45,76.975 U2.3@109.65,76.975 ; 86.725,54.375 88.375,54.375 88.646,54.646 88.646,56.421 C26.2@89.55,57.325
  Bottom Layer w0.3: R15.2 v2(63.525,82.3) ; R18.2 75.617,79.9 76.614,78.903 v3(78.471,78.903)
  other v1: 102.55,76.881
+5: C20.2 C28.2 D7.2 F2.1 J9.1 R6.2 U2.1 U4.16 | length 53.5
  Top Layer w0.3: U2.1@110.275,74.65 U2.1 U2.1@110.85,74.675
  Top Layer w0.5: U4.16 104.055,61.945 C28.2 v1(104.175,62.9) ; U2.1@110.275,74.65 C20.2 R6.2 ; U2.1@110.85,74.675 111.715,75.54 111.715,75.815 v1(111.8,75.9)
  Bottom Layer w0.3: D7.2@107.575,79.85 D7.2 D7.2@107.85,79.825
  Bottom Layer w0.5: D7.2@107.575,79.85 F2.1 ; D7.2@107.85,79.825 115.2,72.475 115.2,70.284 107.816,62.9 v1(104.175,62.9) 104.175,61.575 J9.1
+5_CAR: C22.2 C31.2 D8.2 F3.1 U3.3 U5.16 | length 63.3
  Top Layer w0.3: U3.3 C22.2@77.35,80.38 ; C22.2 77.55,80.375 78.104,80.929 v1(78.104,81.016) ; v1(94.2,79.975) 94.2,85.875 95.995,87.67 U5.16 98.62,87.67 C31.2 ; v1(112.675,73.275) v1(115.975,73.275)
  Bottom Layer w0.3: v1(78.104,81.016) 80.57,78.55 94.2,78.55 ; v1(94.2,79.975) 94.2,78.55 ; v1(112.675,73.275) 111.925,73.275 106.65,78.55 94.2,78.55 ; v1(115.975,73.275) 117.702,73.275 118.425,72.552 D8.2 118.85,72.725 F3.1
+12_CAR: D6.2 F1.1 J10.1 R13.2 R17.2 | length 89.1
  Top Layer w0.3: R13.2 67.275,84.7 v1(70.125,87.55) 71.425,87.55 R17.2
  Bottom Layer w0.3: v1(70.125,87.55) 75.85,87.55 82.55,80.85 103.65,80.85 106.65,83.85 109.1,83.85 111.625,81.325 117.905,81.325 D6.2@118.425,80.805 ; F1.1 D6.2@118.425,80.805 ; J10.1 127.125,64.05 127.125,68.875 124.925,71.075 124,71.075 123.075,72 123.075,73.55 122.075,74.55 121.175,74.55 119.85,75.875 119.85,78.795 118.425,80.22 D6.2 D6.2@118.425,80.805
GND: C1.2 C2.2 C3.2 C4.2 C5.2 C6.2 C7.2 C8.2 C9.2 C10.2 C11.2 C12.1 C13.2 C14.2 C15.2 C16.2 C17.2 C18.2 C19.2 C20.1 C21.1 C22.1 C23.1 C24.1 C25.1 C26.1 C27.1 C30.1 C31.1 D1.1 D2.1 D3.1 D4.1 D5.1 D6.1 D7.1 D8.1 D14.2 J1.2 J2.3 J3.1 J4.4 J10.4 pad. Q1.2 Q2.2 Q3.2 Q4.2 Q5.2 Q6.2 Q7.2 R8.1 R9.1 R10.1 R11.1 R12.1 R14.1 R16.1 R19.1 U1.3 U1.4 U1.5 U1.6 U1.8 U1.15 U1.16 U1.29 U1.32 U1.34 U1.35 U1.36 U1.38 U1.39 U1.42 U1.43 U1.44 U2.2 U3.2 U3.4 U3.5 U3.8 U3.9 U3.10 U3.11 U3.12 U3.13 U3.14 U4.2 U4.7 U4.8 U5.2 U5.7 U5.8 U5.9 U5.10 U5.15 | length 7.8
  Top Layer w0.3: Q5.2 70.6,70.5 R12.1 ; Q6.2 R14.1 ; U3.13 U3.13@70.275,79.11 ; U3.11 U3.11@70.275,81.65 ; C1.2 73.475,72.175 U1.4 ; U3.2@74.725,79.11 U3.2
  other v1: 84.397,56.357 86.55,56.357
  other v2: 78.975,52.025 65,55 120,55 97.45,55.775 62.5,60 97.5,60 117.5,60 122.5,60 111.517,61.4 60,65 75,65 120,65 77.5,70 122.5,70 60,75 100,75 72.5,80 92.5,80 102.5,80 110,80.975 90.627,83.425 100,85 110,85
  other v4: 72.425,66.044
NetC1_1: C1.1 U1.7 | length 2.1
  Top Layer w0.3: C1.1 73.475,69.775 U1.7
NetC12_2: C12.2 J2.1 R1.2 R2.1 | length 6.5
  Top Layer w0.3: C12.2 R2.1 R1.2 J2.1
NetC15_1: C15.1 U1.31 XTAL1.2 | length 23.7
  Top Layer w0.3: v1(84.2,72.977) 86.598,72.977 U1.31 ; XTAL1.2@100.6,66.525 100.625,66.55 v1(100.625,68.45)
  Bottom Layer w0.3: v1@84.25,72.975 90.625,72.975 96.475,67.125 C15.1 99.3,67.125 v1(100.625,68.45)
NetC16_1: C16.1 U1.30 XTAL1.1 | length 15.5
  Top Layer w0.3: v1(84.925,72.156) 86.581,72.156 U1.30 ; XTAL1.1@91.1,66.525 91.125,66.55 v1(91.125,68.402)
  Bottom Layer w0.3: v1(84.925,72.156) 87.371,72.156 v1(91.125,68.402) 92.402,67.125 C16.1
NetC23_2: C23.2 R18.1 U1.1 U3.1 | length 6.5
  Top Layer w0.3: U1.1 U3.1 75.313,77.953 76.303,77.953 v1(76.35,78)
  Bottom Layer w0.3: R18.1 v1(76.35,78) C23.2
NetC28_1: C28.1 C29.1 J9.4 Q7.3 U4.9 U4.10 U4.15 | length 29.8
  Top Layer w0.3: U4.10 U4.9 ; C29.1 U4.9 ; 107.513,60.1 107.511,60.098 Q7.3 107.027,59.925 C28.1 103.975,59.925 103.225,60.675 U4.15 101.734,60.609 100.571,60.609 99.85,59.888 99.85,53.773 100.568,53.055 U4.9
  Top Layer w0.5: 107.513,60.1 111.825,60.1 J9.4@115.425,56.5
NetC29_2: C29.2 R20.1 R21.1 | length 4.8
  Top Layer w0.3: R21.1 R20.1@106.298,55.575 ; C29.2 106.075,55.352 R20.1@106.298,55.575 ; R20.1 R20.1@106.298,55.575
NetC30_2: C30.2 R22.1 R23.1 | length 4.1
  Top Layer w0.3: R22.1 C30.2 99.974,80.501 100.575,79.9 R23.1
NetD1_2: D1.2 R3.1 | length 2.6
  Top Layer w0.3: D1.2 R3.1
NetD2_2: D2.2 R4.1 | length 2.6
  Top Layer w0.3: D2.2 R4.1
NetD3_2: D3.2 R5.1 | length 2.6
  Top Layer w0.3: D3.2 R5.1
NetD4_2: D4.2 R6.1 | length 3.1
  Top Layer w0.3: R6.1 R6.1@115.467,76.55 ; D4.2@117.725,75.925 D4.2
  Top Layer w0.5: R6.1@115.467,76.55 116.092,75.925 D4.2@117.725,75.925
NetD5_2: D5.2 R7.1 | length 3.1
  Top Layer w0.3: R7.1 115.475,80.125 115.854,80.504 117.629,80.504 D5.2
NetD9_1: D9.1 D10.1 D11.1 J5.1 R16.2 U3.6 | length 44.7
  Top Layer w0.3: v1(73.7,84.175) 75.185,84.175 U3.6 77.315,84.19 R16.2
  Bottom Layer w0.3: J5.1 68.175,54.22 67.7,54.695 67.7,59.865 68.945,61.11 D9.1 ; v1(73.7,84.175) 73.15,84.175 69.1,80.125 D9.1 ; D11.1 D10.1 72.85,61.11 D9.1
NetD9_2: D9.2 J5.2 Q1.3 | length 8.6
  Top Layer w0.3: Q1.3@69.1,56.658 Q1.3
  Top Layer w0.5: Q1.3@69.1,56.658 70.675,55.083 J5.2
  Bottom Layer w0.5: D9.2 69.1,55.35 J5.2
NetD10_2: D10.2 J5.3 Q2.3 | length 7.5
  Top Layer w0.3: J5.3@72.925,54.025 J5.3
  Top Layer w0.5: J5.3@72.925,54.025 Q2.3
  Bottom Layer w0.3: J5.3@72.875,54.075 J5.3
  Bottom Layer w0.5: J5.3@72.875,54.075 D10.2
NetD11_2: D11.2 J5.4 Q3.3 | length 8
  Top Layer w0.5: J5.4 76.6,54.7 Q3.3
  Bottom Layer w0.5: J5.4 76.6,54.7 D11.2
NetD12_1: D12.1 J7.2 Q4.3 | length 7.7
  Top Layer w0.254: J7.2 J7.2@62.575,74.525 ; Q4.3@66.075,74.575 Q4.3
  Top Layer w0.3: J7.2@62.575,74.525 Q4.3 ; Q4.3@66.075,74.575 D12.1
NetD12_2: D12.2 R13.1 | length 2.6
  Top Layer w0.3: D12.2 R13.1
NetD13_1: D13.1 J7.1 U1.2 | length 17.8
  Top Layer w0.3: J7.1 62.15,78.15 63.11,79.11 63.525,79.11 ; D13.1 63.525,79.11 ; U1.2@74.975,73.7 74.45,73.7 70.989,77.161 68.883,77.161 66.934,79.11 63.525,79.11
NetD13_2: D13.2 R15.1 | length 4.7
  Top Layer w0.3: v1(59.475,81.4) 60.086,80.789 D13.2
  Bottom Layer w0.3: v1(59.475,81.4) 60.075,80.8 61.475,80.8 R15.1
NetD14_1: D14.1 R17.1 U3.7 | length 11.5
  Top Layer w0.3: v1@68.35,88.404 68.496,88.55 72.617,88.55 73.45,87.717 R17.1 73.45,86.851 74.841,85.46 U3.7
  Bottom Layer w0.3: D14.1 66.8,88.15 68.021,88.15 v1(68.35,88.479)
NetF1_2: F1.2 J4.2 | length 10.9
  Bottom Layer w0.3: F1.2 118.825,86.875 120.1,85.6 120.1,82.925 J4.2
NetF2_2: F2.2 J3.2 | length 5.4
  Bottom Layer w0.3: F2.2 F2.2@107.917,85.1
  Bottom Layer w0.5: F2.2@107.917,85.1 109.642,86.825 J3.2
NetF3_2: F3.2 J4.3 | length 4.6
  Bottom Layer w0.3: J4.3 124.222,73.803 124.222,73.078 F3.2
NetJ1_3: J1.3 U1.27 | length 19.1
  Top Layer w0.3: v1(82.929,69.775) U1.27
  Bottom Layer w0.3: v1(82.929,69.775) 82.929,73.929 86.225,77.225 90.365,77.225 J1.3
NetJ1_4: J1.4 U1.33 | length 3.4
  Top Layer w0.3: U1.33 88.725,74.575 J1.4
NetJ2_4: J2.4 U1.24 | length 20.9
  Top Layer w0.3: U1.24 87.52,67.375 89.899,69.754 90.15,69.754 90.158,69.746 100.071,69.746 100.083,69.758 103.639,69.758 103.672,69.725 104.38,69.725 J2.4
NetJ2_5: J2.5 U1.23 | length 20.2
  Top Layer w0.3: U1.23 87.825,66.575 90.442,69.192 100.301,69.192 100.313,69.204 103.127,69.204 v1(103.356,68.975)
  Bottom Layer w0.3: v1(103.356,68.975) 103.356,71.241 J2.5
NetJ6_1: J6.1 Q5.3 | length 4.2
  Top Layer w1.5: J6.1 62.7,69.55 Q5.3
NetJ6_2: J6.2 Q6.3 | length 3.8
  Top Layer w1.5: J6.2@62.75,66.5 63.775,65.475 Q6.3
NetJ8_1: J8.1 R22.2 U5.13 | length 7.7
  Top Layer w0.3: U5.13 98.485,83.86 R22.2 103.775,84.05 J8.1
NetJ8_2: J8.2 R23.2 U5.12 | length 25.5
  Top Layer w0.3: R23.2 100.575,78 100.104,77.529 95.746,77.529 95.05,78.225 95.05,81.65 95.99,82.59 U5.12 97.038,82.59 97.523,83.075 100.325,83.075 101.025,82.375 104.625,82.375 105.425,83.175 105.425,85.4 J8.2
NetJ9_2: J9.2 J10.2 R20.2 U4.13 | length 31.2
  Top Layer w0.3: U4.13 101.95,58.285 105.273,58.285 106.083,57.475 R20.2 106.55,57.65 113,57.65 114.025,56.625 114.025,54.725 J9.2
  Bottom Layer w0.3: J9.2 117.975,55.675 117.975,57.4 J10.2
NetJ9_3: J9.3 J10.3 R21.2 U4.12 | length 27.4
  Top Layer w0.3: U4.12 103.265,56.865 103.875,57.475 R21.2 104.475,57.475 105.325,56.625 112.125,56.625 J9.3
  Bottom Layer w0.3: J9.3@112.45,56.225 J9.3@112.487,56.262 ; J9.3 122.475,66.175 J10.3
NetQ1_1: Q1.1 R8.2 U1.12 | length 10.8
  Top Layer w0.3: Q1.1 70.05,61.575 R8.2 70.075,61.892 71.733,63.55 76.05,63.55 76.822,64.322 76.822,64.797 U1.12
NetQ2_1: Q2.1 R9.2 U1.13 | length 8
  Top Layer w0.3: Q2.1 R9.2 74.098,61.873 74.098,62.123 74.9,62.925 76.546,62.925 77.579,63.958 77.579,64.754 U1.13
NetQ3_1: Q3.1 R10.2 U1.14 | length 5.9
  Top Layer w0.3: Q3.1 R10.2 77.55,61.942 78.5,62.892 U1.14
NetQ4_1: Q4.1 R11.2 U1.9 | length 11
  Top Layer w0.3: Q4.1 R11.2 70.967,73.575 72.025,72.517 72.025,68.925 72.775,68.175 U1.9
NetQ5_1: Q5.1 R12.2 U1.10 | length 7.3
  Top Layer w0.3: Q5.1 70.6,68.6 R12.2 70.917,68.625 72.167,67.375 U1.10
NetQ6_1: Q6.1 R14.2 U1.11 | length 7.5
  Top Layer w0.3: Q6.1 R14.2 72.791,64.525 74.841,66.575 U1.11
NetQ7_1: Q7.1 R19.2 U1.22 | length 32.1
  Top Layer w0.3: U1.22 84.9,64.325 108.15,64.325 ; Q7.1 108.15,64.325 ; R19.2 114.4,64.325 108.15,64.325
NetR1_1: R1.1 U1.18 | length 34.5
  Top Layer w0.3: U1.18 81.7,65.725 82.65,66.675 84.825,66.675 86.5,65 111.491,65 113.291,66.8 R1.1
NetR3_2: R3.2 U1.20 | length 4.1
  Top Layer w0.3: U1.20 83.3,63.675 85.025,61.95 R3.2@85.45,61.95
NetR4_2: R4.2 U1.21 | length 5.3
  Top Layer w0.3: U1.21 84.124,64.851 84.124,63.851 84.6,63.375 86.25,63.375 R4.2
NetR5_2: R5.2 U1.19 | length 3.4
  Top Layer w0.3: U1.19 82.5,62.498 82.998,62 R5.2
NetU1_25: U1.25 U4.3 | length 17.5
  Top Layer w0.3: v1(84.2,68.175) U1.25 ; U4.3 92.055,59.4 v1(93.475,59.4)
  Bottom Layer w0.3: v1(84.2,68.175) 86.05,68.175 93.475,60.75 v1(93.475,59.4)
NetU1_26: U1.26 U4.6 | length 22.5
  Top Layer w0.3: v1(84.925,68.975) U1.26 ; U4.6 v1(94.5,55.595)
  Bottom Layer w0.3: v1(84.925,68.975) 86.725,68.975 94.5,61.2 v1(94.5,55.595)
NetU1_37: U1.37 U5.3 | length 10.9
  Top Layer w0.3: U1.37 82.5,78.167 85,80.667 85,83.9 86.23,85.13 U5.3
NetU1_41: U1.41 U5.6 | length 15.5
  Top Layer w0.3: v1@79.296,72.725 v1(79.3,72.729) U1.41 ; v1(84.204,77.629) 85.546,78.971 85.546,80.429 85.554,80.437 85.554,80.624 86.25,81.32 U5.6
  Bottom Layer w0.3: v1(79.3,72.729) 84.2,77.629 v1(84.204,77.629)
pads on no net: J2.6 J3.3 J3.4 J4.1 U4.4 U4.5 U4.11 U4.14 U5.4 U5.5 U5.11 U5.14
copper on no net:
  other v1: 109.525,52.285 118.525,52.285 71.925,52.435 125.59,64.925 60.81,67.75 60.81,76.2 125.665,77.45 101.025,87.74 107.025,87.74 113.475,88.165

## Polygon pours and split planes (outlines as drawn)
GND on Bottom Layer "Bottom Layer-GND" (solid, pour order 2): 56.575,89.525 56.575,50.775 127.975,50.775 128,50.8 128,89.525
GND on Top Layer "Top Layer-GND" (solid, pour order 0): 56.575,89.525 56.575,50.775 128,50.775 128,89.525
GND on GND (split plane): 127.49,51.285 57.085,51.285 57.085,89.015 127.49,89.015
+3.3 on +3.3V (split plane): 127.49,51.285 57.085,51.285 57.085,89.015 127.49,89.015

## Silkscreen, mask and mechanical layers (free items; w line width, h text height)
Top Overlay:
  text "DC-DC SUPPLY" at 118.125,82.725 h1.5 r90
  text "CAR CAN" at 108.8,82.275 h1.5 r90
  text "+3.3V" at 118.925,81.925 h1.5
  text "BMS OK" at 67.725,77.675 h1.5 r90
  text "GND" at 93.893,77.052 h1.5
  text "TX" at 89.088,77.047 h1.5
  text "RX" at 91.603,77.019 h1.5
  text "CAR SUPPLY" at 121.5,73.125 h1.5
  text "+5V" at 119.025,72.975 h1.5
  text "PGC" at 102.647,72.957 h1.5
  text "BMS OK & BALANCING" at 59.1,72 h1.5 r90
  text "HALL CAN" at 122.35,71.15 h1.5
  text "PGD" at 105.134,68.925 h1.5
  text "GND" at 107.75,68.925 h1.5
  text "+3.3V" at 109.834,68.925 h1.5
  text "MCLR" at 112.45,68.925 h1.5
  text "FANS CONTROL" at 58.7,63.4 h1.5
  text "AMS Master" at 118.675,60.25 h3.5 r90
  text "AMS CAN" at 109.35,59.575 h1.5
  text "ERROR" at 82.025,53.6 h1.5
  text "S1" at 85.075,53.6 h1.5
  text "S2" at 87.175,53.6 h1.5
  text "RELAY CONTROL" at 65.575,51.575 h1.5 r90
Bottom Overlay:
  drawing of 1340 lines, arcs and shapes, not listed
  text "e-Tech Racing 2018-2019" at 98.925,87.275 h3
  text "Àlex Sánchez i Benet" at 98.05,85.125 h3
  text "www.pro-circuits.com" at 57.1,58.55 h4 r270

## Text inside footprints (layer, text, board x,y; h text height)
D1: Top Overlay "+" at 85.75,58.95 h1.5 r180
D2: Top Overlay "+" at 87.925,58.95 h1.5 r180
D3: Top Overlay "+" at 83.6,58.95 h1.5 r180
D4: Top Overlay "+" at 118.25,77.2 h1.5 r180
D5: Top Overlay "+" at 118.25,82.325 h1.5 r180
D12: Top Overlay "+" at 66.375,81.65 h0.76 r180
D13: Top Overlay "+" at 59.925,81.089 h0.76 r270
J2: Top Overlay "6" at 100.55,73.1 h1.5; Top Overlay "1" at 113.45,73.1 h1.5